# Altium PCB MiniPowerModule.PcbDoc
Units mil, origin at the board's own origin, x right, y up, seen from the top; angles counter-clockwise.
Board outline 2200 x 1500 mil, 4 copper layers (Top Layer, Ground Plane, Power Plane, Bottom Layer), stack 62.449 mil thick; 91 components, 42 nets, 361 pads, 128 vias.
Unrouted connection lines stored in the file: 56.
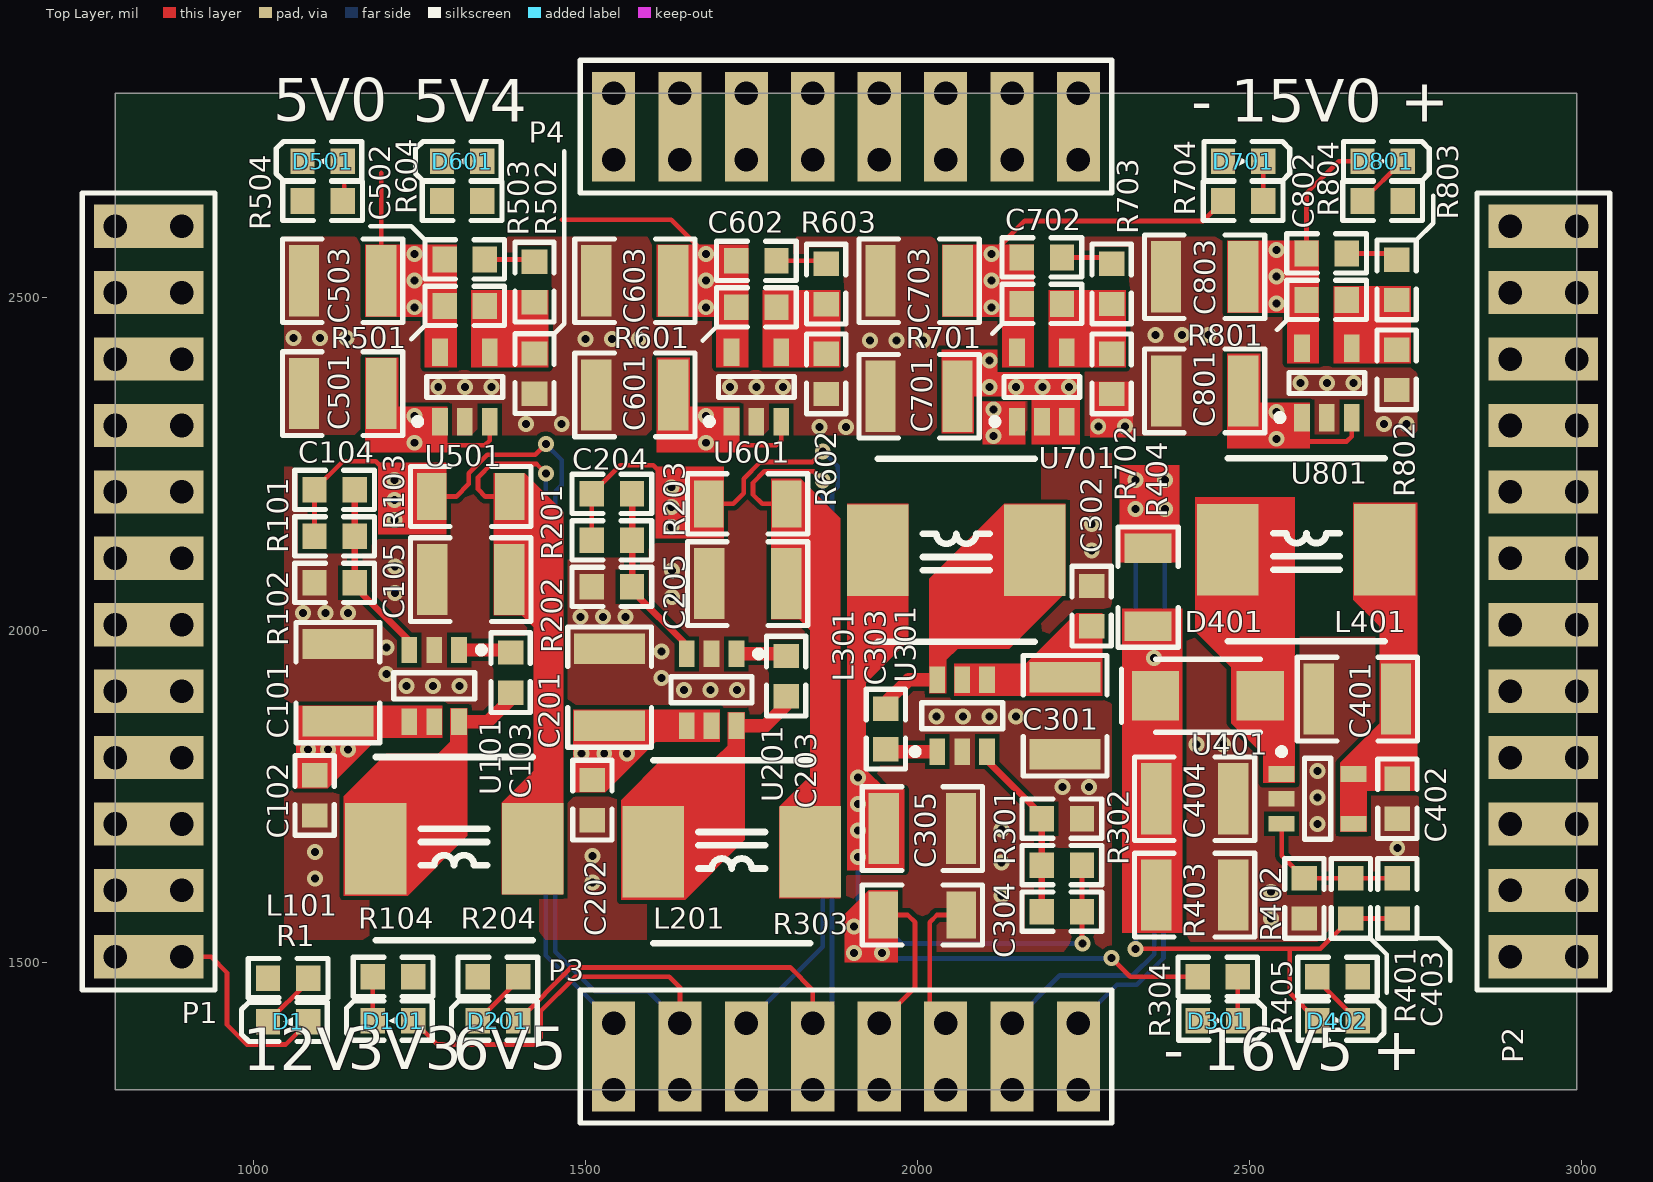
[diagram p0: Top Layer view]
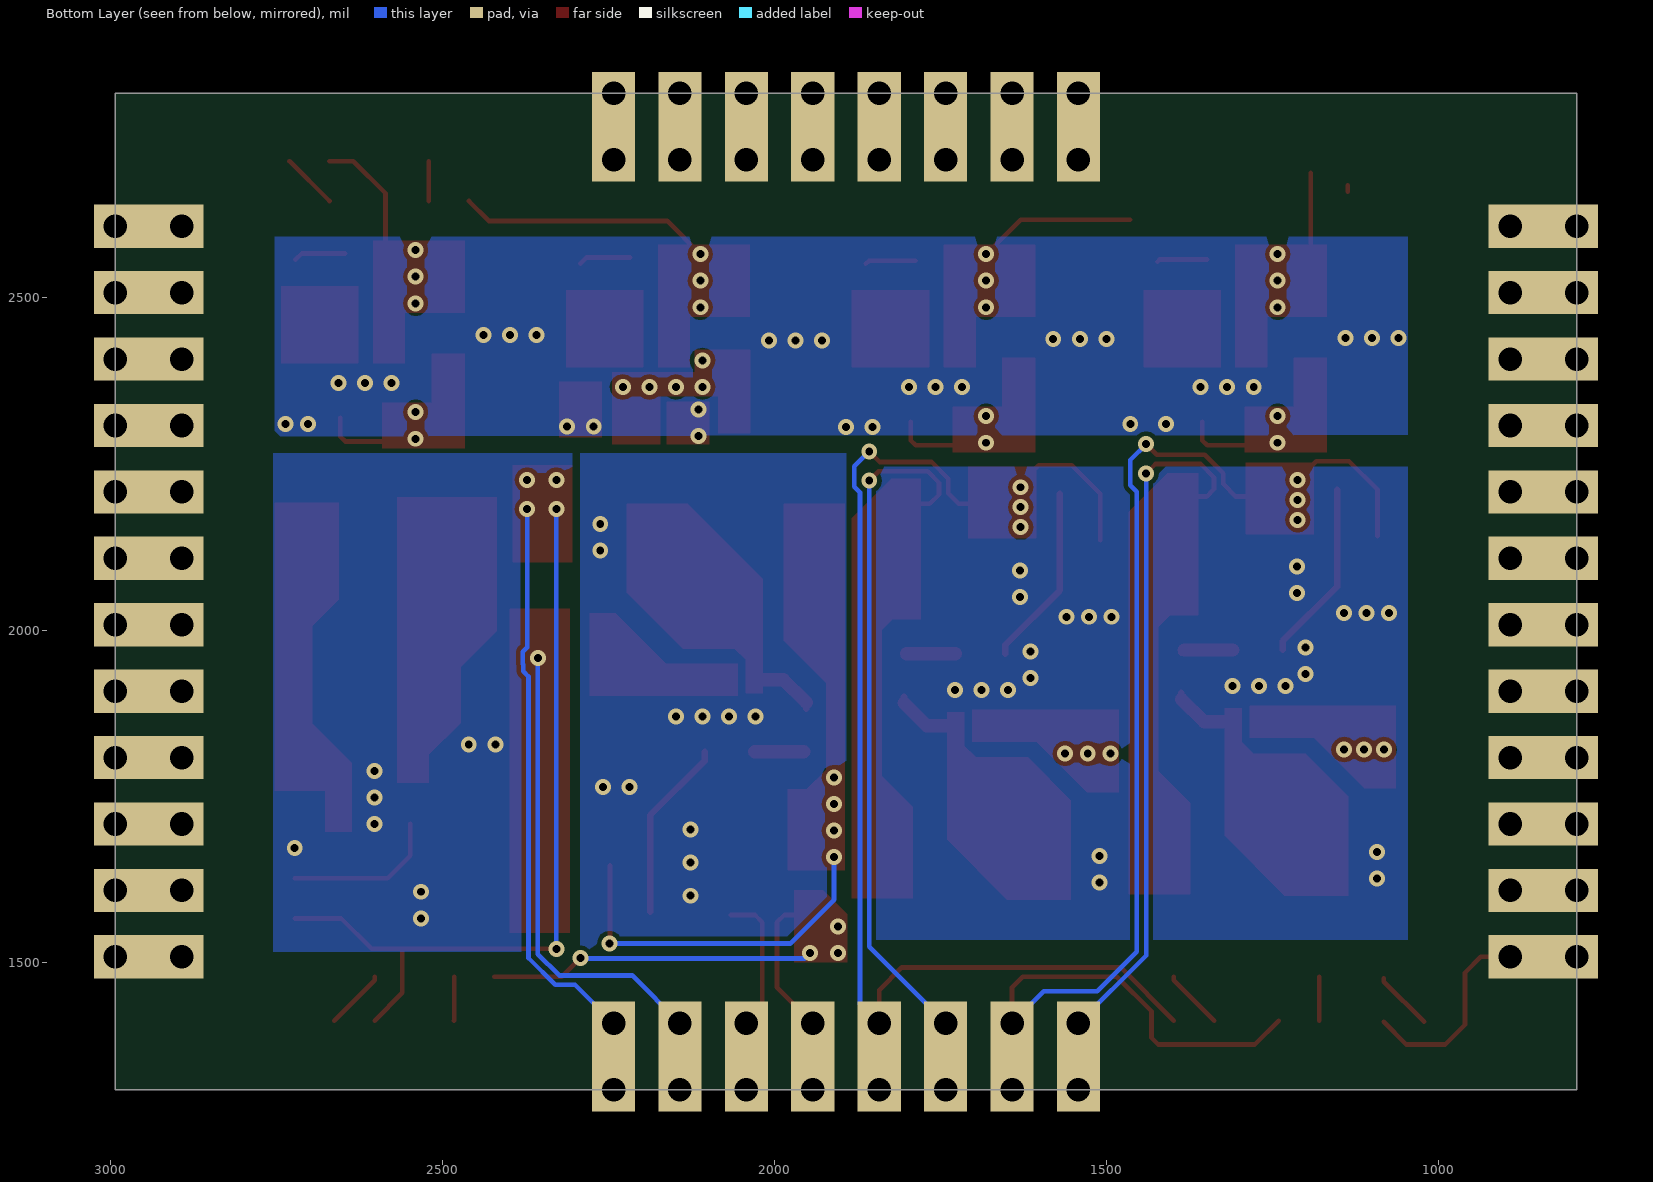
[diagram p1: Bottom Layer view, seen from below]
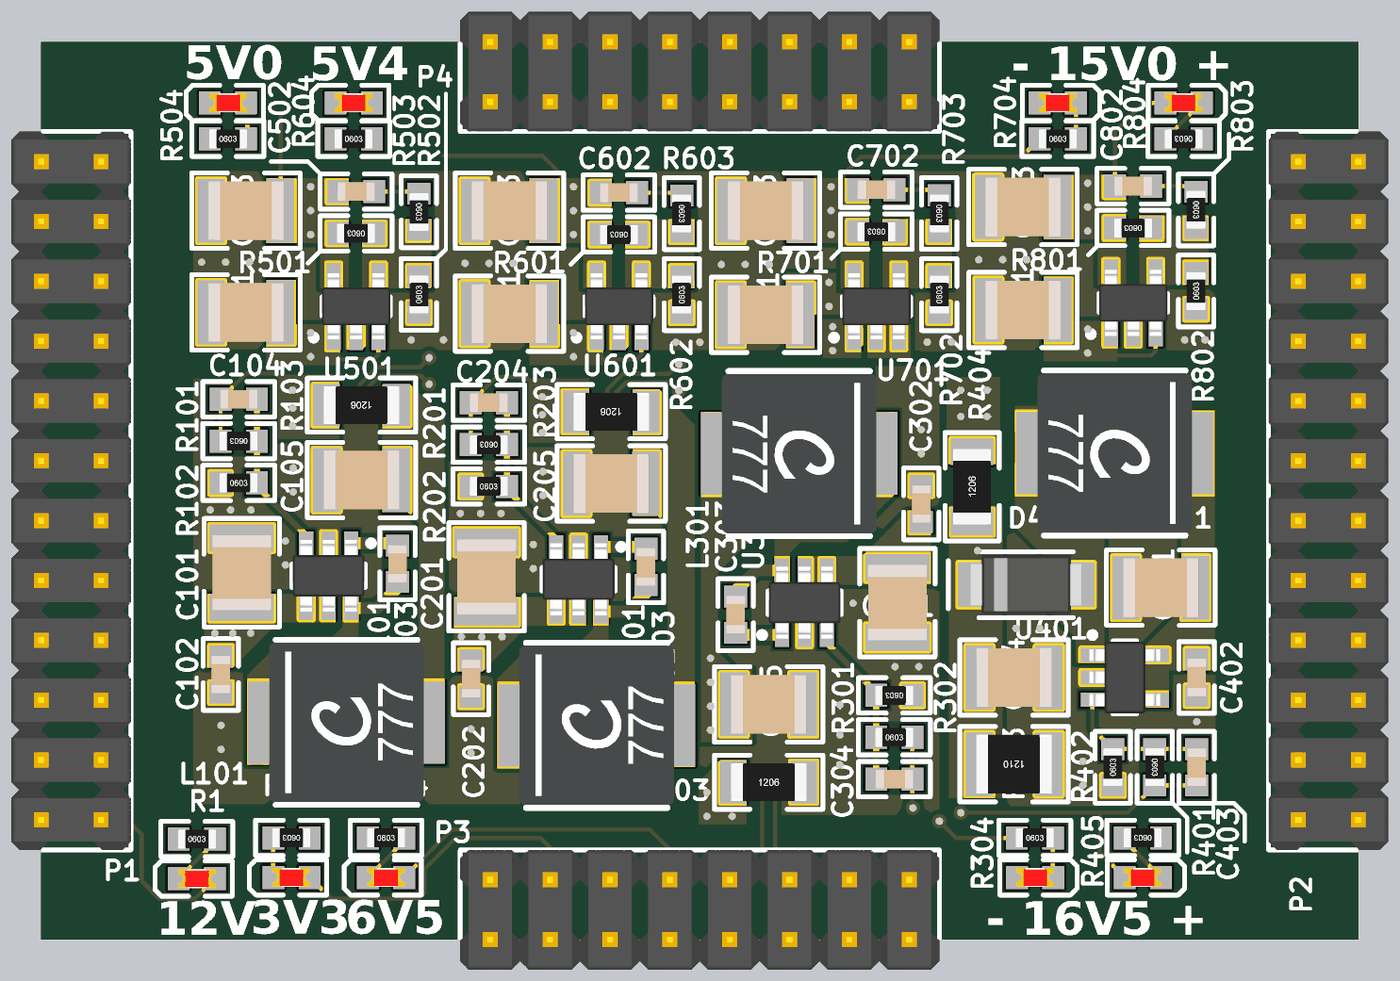
[diagram p2: 3D render of the assembled board from above, using the file's embedded part models]

## Layer stack, top to bottom
Top Solder: solder mask 0.5, Solder Resist, Dk 3.8
Top Layer: signal copper 1.378
Dielectric 1: core 8.284, 7628, Dk 4.5
Ground Plane: signal copper 0.598
Dielectric 3: prepreg 41.929, FR-4, Dk 4.5
Power Plane: signal copper 0.598
Dielectric 4: core 8.284, 7628, Dk 4.5
Bottom Layer: signal copper 1.378
Bottom Solder: solder mask 0.5, Solder Resist, Dk 3.8

## Board outline
2992,1308 792,1308 792,2808 2992,2808

## Design rules (kind name [scope] priority, off if disabled: settings)
Clearance [All] p1: gap=7 ignorepadtopadclearanceinfootprint=FALSE
PlaneConnect [All] p1: pad.planeconnectstyle=Relief pad.reliefexpansion=20 pad.reliefentries=4 pad.reliefconductorwidth=10 pad.reliefairgap=10 via.planeconnectstyle=Direct via.reliefexpansion=20 via.reliefentries=4 via.reliefconductorwidth=10 via.reliefairgap=10
PolygonConnect [All] p1: connectstyle=Direct reliefconductorwidth=10 reliefentries=4 polygonreliefangle="90 Angle" airgapwidth=10
RoutingVias [All] p1: holewidth=12 width=24 viastyle="Through Hole" minholewidth=12 minwidth=24 maxholewidth=28 maxwidth=50
SolderMaskExpansion [All] p1: expansion=4
Width [All] p1: maxlimit=100 minlimit=7 preferedwidth=10
29 further rules are at their usual default settings.

## Classes and differential pairs
component class Ldo.-16V5.-15V0: C701 C702 C703 D701 R701 R702 R703 R704 U701
component class Ldo.+16V5.+15V0: C801 C802 C803 D801 R801 R802 R803 R804 U801
component class Ldo.+6V5.+5V4: C601 C602 C603 D601 R601 R602 R603 R604 U601
component class Ldo.+6V5.+5V0: C501 C502 C503 D501 R501 R502 R503 R504 U501
component class Dcdc.12V0.+16V5: C401 C402 C403 C404 D401 D402 L401 R401 R402 R403 R404 R405 U401
component class Dcdc.12V0.-16V5: C301 C302 C303 C304 C305 D301 L301 R301 R302 R303 R304 U301
component class Dcdc.12V0.+6V5: C201 C202 C203 C204 C205 D201 L201 R201 R202 R203 R204 U201
component class Dcdc.12V0.+3V3: C101 C102 C103 C104 C105 D101 L101 R101 R102 R103 R104 U101
component class Connector: D1 P1 P2 P3 P4 R1

## Components (designator, comment, footprint, x,y, rotation, side; value= is the part's Value field where it differs from the comment)
C101 "Cap" C1210 1127,1921 r270 top value=10uf@50V
C102 "Cap" C0603 1092,1751 r90 top value=0.1uf
C103 "Cap" C0603 1387,1936 r90 top value=0.1uf
C104 "Cap" C0603 1122,2211 r0 top value=NC
C105 "Cap" C1210 1327,2076 r0 top value=10uf@50V
C201 "Cap" C1210 1536,1914 r270 top value=10uf@50V
C202 "Cap" C0603 1510,1744 r90 top value=0.1uf
C203 "Cap" C0603 1802,1930.68 r90 top value=0.1uf
C204 "Cap" C0603 1539.6,2205.13 r0 top value=NC
C205 "Cap" C1210 1744,2070 r0 top value=10uf@50V
C301 "Cap" C1210 2222,1871 r90 top value=10uf@50V
C302 "Cap" C0603 2262,2036 r270 top value=0.1uf
C303 "Cap" C0603 1952,1851 r270 top value=0.1uf
C304 "Cap" C0603 2217,1576 r180 top value=NC
C305 "Cap" C1210 2007,1701 r180 top value=10uf@50V
C401 "Cap" C1210 2662,1896 r0 top value=10uf@50V
C402 "Cap" C0603 2722,1746 r90 top value=0.1uf
C403 "Cap" C0603 2722,1596 r90 top value=180pf
C404 "Cap" C1210 2417,1746 r180 top value=10uf@50V
C501 "Cap" C1210 1134,2356 r0 top value=10uf@50V
C502 "Cap" C0603 1318,2558 r0 top value=0.1uf
C503 "Cap" C1210 1134,2526 r0 top value=10uf@50V
C601 "Cap" C1210 1574,2354 r0 top value=10uf@50V
C602 "Cap" C0603 1757,2556 r0 top value=0.1uf
C603 "Cap" C1210 1574,2526 r0 top value=10uf@50V
C701 "Cap" C1210 2001.93,2352 r0 top value=10uf@50V
C702 "Cap" C0603 2187,2561 r0 top value=0.1uf
C703 "Cap" C1210 2002,2526 r0 top value=10uf@50V
C801 "Cap" C1210 2432,2360 r0 top value=10uf@50V
C802 "Cap" C0603 2615.68,2567 r0 top value=0.1uf
C803 "Cap" C1210 2431.93,2532 r0 top value=10uf@50V
D1 "LED" LED0603 1052,1410 r180 top value=GREEN
D101 "LED" LED0603 1210,1412 r180 top value=GREEN
D201 "LED" LED0603 1368,1412 r180 top value=GREEN
D301 "LED" LED0603 2452,1412 r0 top value=GREEN
D401 "Diode" DIODE-SMAF 2437,1901 r0 top value=SS14
D402 "LED" LED0603 2632,1412 r0 top value=GREEN
D501 "LED" LED0603 1104,2706 r180 top value=GREEN
D601 "LED" LED0603 1314,2706 r180 top value=GREEN
D701 "LED" LED0603 2490,2706 r0 top value=GREEN
D801 "LED" LED0603 2700,2706 r0 top value=GREEN
L101 "Inductor Iron" L06063 1302,1671 r0 top value=10uH@4A
L201 "Inductor Iron" L06063 1720,1666 r0 top value=10uH@4A
L301 "Inductor Iron" L06063 2058,2120 r180 top value=22uH@2.3A
L401 "Inductor Iron" L06063 2585.11,2120.99 r180 top value=10uH@4A
P1 "Header 12X2" HDR2X12 892,1508 r180 top locked
P2 "Header 12X2" HDR2X12 2992,1508 r180 top locked
P3 "Header 8X2" HDR2X8 1542,1308 r90 top locked
P4 "Header 8X2" HDR2X8 1542,2708 r90 top locked
R1 "Res" R0603 1052,1476 r0 top value=22K1
R101 "Res" R0603 1122,2141 r180 top value=51K
R102 "Res" R0603 1122,2071 r0 top value=22K1
R103 "Res" R1206 1327,2201 r180 top value=0R1
R104 "Res" R0603 1210,1478 r180 top value=3K3
R201 "Res" R0603 1539.6,2135.13 r180 top value=121K
R202 "Res" R0603 1539.6,2065.13 r0 top value=22K1
R203 "Res" R1206 1744,2190 r180 top value=0R1
R204 "Res" R0603 1368,1478 r0 top value=22K1
R301 "Res" R0603 2217,1646 r0 top value=340K
R302 "Res" R0603 2217,1716 r180 top value=22K1
R303 "Res" R1206 2007,1571 r0 top value=0R1
R304 "Res" R0603 2451.68,1478 r0 top value=47K
R401 "Res" R0603 2652,1596 r270 top value=169K
R402 "Res" R0603 2582,1596 r90 top value=13K3
R403 "Res" R1210 2417,1601 r180 top value=NC
R404 "Res" R1206 2347,2064.66 r90 top value=0R1
R405 "Res" R0603 2632,1478 r180 top value=47K
R501 "Res" R0603 1318,2488 r180 top value=316K
R502 "Res" R0603 1423,2386 r90 top value=100K
R503 "Res" R0603 1423,2524 r270 top value=10K
R504 "Res" R0603 1104,2646 r0 top value=10K
R601 "Res" R0603 1757,2486 r180 top value=348K
R602 "Res" R0603 1862,2385.68 r90 top value=100K
R603 "Res" R0603 1862,2521 r270 top value=10K
R604 "Res" R0603 1314,2646 r0 top value=10K
R701 "Res" R0603 2187,2491 r180 top value=147K
R702 "Res" R0603 2292,2385.68 r90 top value=13K
R703 "Res" R0603 2292,2521.32 r270 top value=13K
R704 "Res" R0603 2490,2646 r0 top value=47K
R801 "Res" R0603 2615.69,2497 r180 top value=1M15
R802 "Res" R0603 2721,2391.68 r90 top value=100K
R803 "Res" R0603 2721,2527.32 r270 top value=10K
R804 "Res" R0603 2700,2646 r180 top value=47K
U101 "TPS560430" TPS560430-SOT23-6 1272,1916 r270 top
U201 "TPS560430" TPS560430-SOT23-6 1689.6,1910.13 r270 top
U301 "TPS560430" TPS560430-SOT23-6 2067,1871 r90 top
U401 "LMR62014" LMR62014-SOT23-5 2602,1746 r0 top
U501 "ADP7118" ADP7118-TSOT5 1318,2366 r90 top
U601 "ADP7118" ADP7118-TSOT5 1757,2366 r90 top
U701 "ADP7182" ADP7182-TSOT5 2187,2366 r90 top
U801 "ADP7118" ADP7118-TSOT5 2616,2372 r90 top

## Footprints (in the part's own frame and the unit in brackets; to place one, negate y for a bottom-side part, rotate by r counter-clockwise, add the part's x,y. Pads: shape width x height; smd on the part's side, far side on the other; paste and mask are expansions set on the pad)
ADP7118-TSOT5 [mm] "SOT23, 5-Leads, Body 2.90x2.80mm, Pitch 0.95mm, IPC Medium Density"
  rect 1.05x0.6 smd: 1(-1.325,0.95) 2(-1.325,0) 3(-1.325,-0.95) 4(1.325,-0.95) 5(1.325,0.95)
  silkscreen extent -1.45,-1.45 0.4,1.92, body extent -1.4,-1.45 1.4,1.45, height 1
ADP7182-TSOT5 [mm] "SOT23, 5-Leads, Body 2.90x2.80mm, Pitch 0.95mm, IPC Medium Density"
  rect 1.05x0.6 smd: 1(-1.325,0.95) 2(-1.325,0) 3(-1.325,-0.95) 4(1.325,-0.95) 5(1.325,0.95)
  silkscreen extent -1.45,-1.45 0.4,1.92, body extent -1.4,-1.45 1.4,1.45, height 1
C0603 [mm] "Chip Capacitor, 2-Leads, Body 1.60x0.81mm, IPC Medium Density"
  rect 0.93x0.98 smd: 1(-0.77,0) 2(0.77,0)
  silkscreen extent -1.52,-0.75 1.52,0.75, body extent -0.8,-0.4 0.8,0.4, height 0.78
C1210 [mm] "Chip Capacitor, 2-Leads, Body 3.20x2.50mm, IPC Medium Density"
  rect 1.16x2.72 smd: 1(-1.475,0) 2(1.475,0)
  silkscreen extent -2.3,-1.6 2.3,1.6, body extent -1.6,-1.25 1.6,1.25, height 0.77
DIODE-SMAF [mm] "SMAF; 2 C-Bend Leads; Body 5.0 x 2.7 mm, inc. leads (LxW)"
  rect 1.8x1.9 smd: 1(2,0) 2(-2,0)
  silkscreen extent -3.3,-1.4 2,1.4, body extent -2.35,-1.25 2.35,1.25, height 1
HDR2X8 [mm] "Connector; Male Header; 8x2 Position"
  rect 1.5x1.5 hole 0.9: 1(0,0)
  round 1.5 hole 0.9: 2(2.54,0) 3(0,-2.54) 4(2.54,-2.54) 5(0,-5.08) 6(2.54,-5.08) 7(0,-7.62) 8(2.54,-7.62) 9(0,-10.16) 10(2.54,-10.16) 11(0,-12.7) 12(2.54,-12.7) 13(0,-15.24) 14(2.54,-15.24) 15(0,-17.78) 16(2.54,-17.78)
  silkscreen extent -1.27,-19.05 3.81,1.27, body extent -1.27,-19.05 3.81,1.27, height 9.5
HDR2X12 [mm] "Connector; Male Header; 12x2 Position"
  rect 1.5x1.5 hole 0.9: 1(0,0)
  round 1.5 hole 0.9: 2(2.54,0) 3(0,-2.54) 4(2.54,-2.54) 5(0,-5.08) 6(2.54,-5.08) 7(0,-7.62) 8(2.54,-7.62) 9(0,-10.16) 10(2.54,-10.16) 11(0,-12.7) 12(2.54,-12.7) 13(0,-15.24) 14(2.54,-15.24) 15(0,-17.78) 16(2.54,-17.78) 17(0,-20.32) 18(2.54,-20.32) 19(0,-22.86) 20(2.54,-22.86) 21(0,-25.4) 22(2.54,-25.4) 23(0,-27.94) 24(2.54,-27.94)
  silkscreen extent -1.27,-29.21 3.81,1.27, body extent -1.27,-29.21 3.81,1.27, height 9.5
L06063 [mm] "贴片功率电感 MHCI06030"
  rect 2.35x3.5 smd: 1(-3,0) 2(3,0)
  silkscreen extent -3,-3.5 3,3.5, body extent -3.28,-3.38 3.28,3.38, height 3
LED0603 [mm] "Chip LED, 2-Leads, Body 1.60x0.80mm, IPC Medium Density"
  rect 0.93x0.98 smd: 1(-0.77,0) 2(0.77,0)
  silkscreen extent -1.5,-0.75 1.78,0.75, body extent -0.8,-0.4 0.8,0.4, height 0.6
LMR62014-SOT23-5 [mm] "SOT23, 5-Leads, Body 2.90x2.80mm, Pitch 0.95mm, IPC Medium Density"
  rect 1x0.6 smd: 1(-1.375,0.95) 2(-1.375,0) 3(-1.375,-0.95) 4(1.375,-0.95) 5(1.375,0.95)
  silkscreen extent -1.5,-1.55 0.5,1.92, body extent -1.5,-1.53 1.5,1.53, height 1.45
R0603 [mm] "Chip Resistor, 2-Leads, Body 1.60x0.80mm, IPC Medium Density"
  rect 0.93x0.98 smd: 1(-0.77,0) 2(0.77,0)
  silkscreen extent -1.52,-0.75 1.52,0.75, body extent -0.8,-0.4 0.8,0.4, height 0.44
R1206 [mm] "Chip Resistor, 2-Leads, Body 3.20x1.60mm, IPC Medium Density"
  rect 1.13x1.8 smd: 1(-1.49,0) 2(1.49,0)
  silkscreen extent -2.3,-1.15 2.3,1.15, body extent -1.6,-0.8 1.6,0.8, height 0.6
R1210 [mm] "Chip Resistor, 2-Leads, Body 3.20x2.50mm, IPC Medium Density"
  rect 1.16x2.72 smd: 1(-1.475,0) 2(1.475,0)
  silkscreen extent -2.3,-1.6 2.3,1.6, body extent -1.6,-1.25 1.6,1.25, height 0.58
TPS560430-SOT23-6 [mm] "SOT23, 6-Leads, Body 2.90x2.80mm, Pitch 0.95mm, IPC Medium Density"
  rect 1x0.6 smd: 1(-1.375,0.95) 2(-1.375,0) 3(-1.375,-0.95) 4(1.375,-0.95) 5(1.375,0) 6(1.375,0.95)
  silkscreen extent -1.5,-1.55 0.5,1.93, body extent -1.53,-1.53 1.53,1.53, height 1.1

## Part data
D401: "通用二极管"
L101 L201 L301 L401: "Magnetic-Core Inductor"
P1 P2: "Header, 12-Pin, Dual row"
P3 P4: "Header, 8-Pin, Dual row"
R1 R101 R102 R103 R104 R201 R202 R203 R204 R301 R302 R303 R304 R401 R402 R403 R404 R405 R501 R502 R503 R504 R601 R602 R603 R604 R701 R702 R703 R704 R801 R802 R803 R804: "电阻"
U101 U201 U301: "TPS560430 SIMPLE SWITCHER? 4-V to 36-V, 600-mA Synchronous Step-Down Converter"
U401: "LMR62014 SIMPLE SWITCHER? 20Vout, 1.4A Step-Up Voltage Regulator in SOT-23"
U501 U601 U801: library part ADP7118AUJ, "20 V, 200 mA, Low Noise,CMOS LDO Linear Regulator."
U701: library part ADP7182AUJ, "–28 V, ?200 mA, Low Noise, Linear Regulator"

## Free pads (board coordinates)
  rect 165x65 smd: 2(842,1508) 2(842,1608) 2(842,1708) 2(842,1808) 2(842,1908) 2(842,2008) 2(842,2108) 2(842,2208) 2(842,2308) 2(842,2408) 2(842,2508) 2(842,2608) 2(2942,1508) 2(2942,1608) 2(2942,1708) 2(2942,1808) 2(2942,1908) 2(2942,2008) 2(2942,2108) 2(2942,2208) 2(2942,2308) 2(2942,2408) 2(2942,2508) 2(2942,2608)
  rect 165x65 smd far side: 2(842,1508) 2(842,1608) 2(842,1708) 2(842,1808) 2(842,1908) 2(842,2008) 2(842,2108) 2(842,2208) 2(842,2308) 2(842,2408) 2(842,2508) 2(842,2608) 2(2942,1508) 2(2942,1608) 2(2942,1708) 2(2942,1808) 2(2942,1908) 2(2942,2008) 2(2942,2108) 2(2942,2208) 2(2942,2308) 2(2942,2408) 2(2942,2508) 2(2942,2608)
  rect 65x165 smd: 2(1542,1358) 2(1542,2758) 2(1642,1358) 2(1642,2758) 2(1742,1358) 2(1742,2758) 2(1842,1358) 2(1842,2758) 2(1942,1358) 2(1942,2758) 2(2042,1358) 2(2042,2758) 2(2142,1358) 2(2142,2758) 2(2242,1358) 2(2242,2758)
  rect 65x165 smd far side: 2(1542,1358) 2(1542,2758) 2(1642,1358) 2(1642,2758) 2(1742,1358) 2(1742,2758) 2(1842,1358) 2(1842,2758) 2(1942,1358) 2(1942,2758) 2(2042,1358) 2(2042,2758) 2(2142,1358) 2(2142,2758) 2(2242,1358) 2(2242,2758)

## Via types
v1: diameter 24, hole 12, Top Layer to Bottom Layer, tented both sides, 128 vias

## Nets (pads, with @x,y where several pads share a name; then routed paths per layer and width w, separated by ;. In a path a pad name is that pad's centre, name@x,y a point inside that pad or via, vN(x,y) a via of type N, cw(c..) or ccw(c..) an arc to the next point about the centre after c; other vN are vias at no path point)
3V3_OUT: C104.1 D101.1 P2.1 P2.2 P2.3 P2.4 P3.3 P3.4 pad.2@1642,1358 pad.2@2942,1508 pad.2@2942,1608 R101.2 R103.2 | length 2037.3
  Top Layer w7: R101.2 C104.1 1134.69,2254 1184,2254 v1(1212,2226) ; D101.1 1276.31,1376 1422,1376 1432,1386 1432,1425.89 1484.11,1478 1626,1478 1642,1462 P3.4 pad.2@1642,1358 ; R103.2 1305,2201 1324,2220 1324,2236 1352,2264 1424,2264 v1(1440,2280)
  Bottom Layer w7: v1(1440,2280) 1464,2256 1464,2218 1454,2208 1454,1515.8 1513.8,1456 1594,1456 P3.4
  other v1: 1212,2166 1212,2196
5V0_OUT: C502.1 C503.2 D501.1 P2.5 P2.6 P2.7 P2.8 pad.2@2942,1708 pad.2@2942,1808 R501.2 U501.5 | length 162.2
  Top Layer w7: C503.2 1192.07,2688.24
  other v1: 1242,2486 1242,2526 1242,2566
5V4_OUT: C602.1 C603.2 D601.1 P2.9 P2.10 P2.11 P2.12 pad.2@2942,1908 pad.2@2942,2008 R601.2 U601.5 | length 238.2
  Top Layer w7: 1464.31,2618 1629,2618 v1(1681,2566)
  other v1: 1681,2486 1681,2526
6V5_OUT: C204.1 C501.2 C601.2 D201.1 P1.9 P1.10 P1.11 P1.12 P3.7 P3.8 pad.2@842,1908 pad.2@842,2008 pad.2@1842,1358 R201.2 R203.2 U501.1 U501.3 U601.1 U601.3 | length 2191.6
  Top Layer w7: U501.1 1280.6,2283.4 1286,2278 1348,2278 1355.4,2285.4 U501.3 ; D201.1 1478.31,1492 1808,1492 1842,1458 P3.8 pad.2@1842,1358 ; R201.2 C204.1 1552.28,2248.13 1601.6,2248.13 v1@1629.6,2220.13 ; R203.2 1722,2190 1738,2206 1738,2227.8 1763.2,2253 1841,2253 v1(1857,2269) ; U601.1 1719.6,2283.4 1725,2278 1787,2278 1794.4,2285.4 U601.3
  Bottom Layer w7: P3.8 1871,1437 1871,2207.18 1879.5,2215.68 1879.5,2246.5 v1(1857,2269)
  other v1: 1629,2155 1629,2185 1629,2215 1242,2282 1681,2282 1242,2322 1681,2322
12V0_IN: C101.2 C102.2 C201.2 C202.2 C301.2 C302.2 C401.2 C402.2 D1.1 L401.1 P1.1 P1.2 P1.3 P1.4 pad.2@842,1508 pad.2@842,1608 U101.4 U101.5 U201.4 U201.5 U301.4 U301.5 U401.4 U401.5 | length 354.8
  Top Layer w7: pad.2@842,1508 P1.1 936,1508 960,1484 960,1406 990,1376 1048.31,1376 D1.1
  other v1: 1494,1814 1528,1814 1562,1814 1082,1820 1112,1820 1142,1820
15V0_OUT: C802.1 C803.2 D801.1 P2.13 P2.14 P2.15 P2.16 pad.2@2942,2108 pad.2@2942,2208 R801.2 U801.5 | length 195
  Top Layer w7: C802.1 2585.37,2657.68 2633.69,2706 D801.1
  other v1: 2540,2492 2540,2532 2540,2572
16V5_OUT: C403.1 C801.2 D402.1 P1.13 P1.14 P1.15 P1.16 P3.15 P3.16 pad.2@842,2108 pad.2@842,2208 pad.2@2242,1358 R401.2 R404.2 U801.1 U801.3 | length 2189.9
  Top Layer w7: v1(2328,1520) 2560,1520 ; U801.1 2578.6,2289.4 2584,2284 2646,2284 2653.4,2291.4 U801.3 ; D402.1 2560,1453.69 2560,1520 ; C403.1 R401.2 2606.32,1520 2560,1520
  Bottom Layer w7: P3.16 2300,1466 2329.8,1466 2370,1506.2 2370,1930 2378,1938 2378,1948.18 2378.5,1948.68 2378.5,1967.32 2372,1973.82 v1(2372,2182) ; v1(2328,1520) v1(2328,2182)
  other v1: 2328,2226 2372,2226 2540,2288 2540,2328
-15V0_OUT: C702.1 C703.2 P2.21 P2.22 P2.23 P2.24 pad.2@2942,2508 pad.2@2942,2608 R701.2 R704.1 U701.5 | length 381.5
  Top Layer w7: v1(2111.31,2566) 2161.31,2616 2429.69,2616 R704.1
  other v1: 2111.31,2486 2111.31,2526
-16V5_OUT: C701.2 P1.21 P1.22 P1.23 P1.24 P3.9 P3.10 pad.2@842,2508 pad.2@842,2608 pad.2@1942,1358 R303.1 R304.1 U701.2 U701.3 | length 817.3
  Top Layer w7: P3.9 1942,1358 P3.10 1996,1462 1996,1560 1985,1571 R303.1 ; v1(2292,1506) 2320,1478 R304.1
  Bottom Layer w7: v1(1946,1514) 1954.5,1505.5 2291.5,1505.5 v1(2292,1506)
  other v1: 1904,1514 1904,1554 2108,2366 2148,2366 2188,2366 2228,2366 2108,2406
GND: C101.1 C102.1 C105.1 C201.1 C202.1 C205.1 C304.1 C305.2 C401.1 C402.1 C404.1 C501.1 C503.1 C601.1 C603.1 C701.1 C703.1 C801.1 C803.1 D301.1 D701.1 L301.2 P1.5 P1.6 P1.7 P1.8 P1.17 P1.18 P1.19 P1.20 P2.17 P2.18 P2.19 P2.20 P4.1 P4.2 P4.3 P4.4 P4.5 P4.6 P4.7 P4.8 P4.9 P4.10 P4.11 P4.12 P4.13 P4.14 P4.15 P4.16 pad.2@842,1708 pad.2@842,1808 pad.2@842,2308 pad.2@842,2408 pad.2@1542,2758 pad.2@1642,2758 pad.2@1742,2758 pad.2@1842,2758 pad.2@1942,2758 pad.2@2042,2758 pad.2@2142,2758 pad.2@2242,2758 pad.2@2942,2308 pad.2@2942,2408 R1.1 R102.1 R104.1 R202.1 R204.1 R301.2 R402.1 R403.1 R405.1 R502.1 R504.1 R602.1 R604.1 R702.1 R802.1 R804.1 U101.2 U201.2 U401.2 U501.2 U601.2 U701.1 U801.2 | length 547.6
  Top Layer w7: R301.2 C304.1 2247.31,1528.69 v1(2248,1528)
  Bottom Layer w7: v1(1910,1658) 1910,1594 1976,1528 v1(2248,1528)
  other v1: 2532,1566 2532,1606 1510,1620 1092.4,1625.87 1510,1660 1092.4,1665.87 2722,1672 1910,1698 2602,1708 1910,1738 2602,1748 1910,1778 2602,1788 2420,1828 2460,1828 1648,1910 1688,1910 1728,1910 1230.4,1915.87 1270.4,1915.87 1310.4,1915.87 1614,1928 1200,1934 1614,1968 1200,1974 1492,2020 1526,2020 1560,2020 1074.4,2025.87 1108.4,2025.87 1142.4,2025.87 1630,2050 1213,2056 1630,2090 1213,2096 2114,2292 1852,2306 1892,2306 2271.83,2306.4 2311.83,2306.4 1410,2310 1464,2310 2702,2310 2736,2310 2114,2332 1278.07,2366 1318.07,2366 1358.07,2366 1717.07,2366 1757.07,2366 1797.07,2366 2576.07,2372 2616.07,2372 2656.07,2372 1927.93,2436 1967.93,2436 2007.93,2436 1500,2438 1540,2438 1580,2438 1060,2440 1100,2440 1140,2440 2358,2444 2398,2444 2438,2444
I_3V3+: C105.2 L101.2 P3.1 P3.2 pad.2@1542,1358 R103.1 | length 1068
  Top Layer w7: R103.1@1385.66,2212.34 R103.1 1349,2201 1338,2212 1338,2230.2 1357.8,2250 1426,2250 v1(1440,2236)
  Bottom Layer w7: v1(1440,2236) 1440,1510 P3.2
I_6V5+: C205.2 L201.2 P3.5 P3.6 pad.2@1742,1358 R203.1 | length 1068.3
  Top Layer w7: R203.1 1766,2190 1752,2204 1752,2222 1769,2239 1843,2239 v1(1857,2225) ; R203.1@1803.26,2195.13 R203.1@1803.26,2206.47
  Bottom Layer w7: P3.6 1857,1523 v1(1857,2225)
I_16V5+: C404.2 D401.2 P3.13 P3.14 pad.2@2142,1358 R403.2 R404.1 | length 703.1
  Bottom Layer w7: P3.14 2214,1480 2324,1480 2356,1512 v1(2356,1958)
I_-16V5-: C301.1 C302.1 C305.1 P3.11 P3.12 pad.2@2042,1358 R302.1 R303.2 U301.2 | length 314.2
  Top Layer w7: P3.11 2042,1358 P3.12 2018,1432 2018,1560 2029,1571 R303.2
  other v1: 2126,1600 2126,1650 2126,1700 2218,1764 2258,1764 2028,1870 2068,1870 2108,1870 2148,1870 2262,2120 2262,2160
NetC103_1: C103.1 L101.1 U101.6 | length 101.4
  Top Layer w10: C103.1@1387,1896 C103.1
  Top Layer w20: U101.6 1352.87,1861.87 C103.1@1387,1896
NetC103_2: C103.2 U101.1 | length 79.2
  Top Layer w10: C103.2@1383.18,1970.13 C103.2
  Top Layer w20: U101.1 C103.2@1383.18,1970.13
NetC104_2: C104.2 R101.1 R102.2 U101.3 | length 274.9
  Top Layer w10: C104.2 R102.2 1152.32,2065.68 1234.6,1983.4 U101.3
NetC203_1: C203.1 L201.1 U201.6 | length 101.4
  Top Layer w10: C203.1@1804.6,1890.13 C203.1@1804.6,1899.82
  Top Layer w20: U201.6 1770.46,1856 C203.1@1804.6,1890.13
NetC203_2: C203.2 U201.1 | length 79.2
  Top Layer w10: C203.2@1800.78,1964.27 C203.2@1804.6,1960.45
  Top Layer w20: U201.1 C203.2@1800.78,1964.27
NetC204_2: C204.2 R201.1 R202.2 U201.3 | length 274.9
  Top Layer w10: C204.2 1569.91,2059.82 1652.2,1977.54 U201.3
NetC303_1: C303.1 L301.1 U301.6 | length 101.4
  Top Layer w10: C303.1 C303.1@1952,1891
  Top Layer w20: C303.1@1952,1891 1986.13,1925.13 U301.6
NetC303_2: C303.2 U301.1 | length 79.2
  Top Layer w10: C303.2 C303.2@1955.82,1816.87
  Top Layer w20: C303.2@1955.82,1816.87 U301.1
NetC304_2: C304.2 R301.1 R302.2 U301.3 | length 274.9
  Top Layer w10: U301.3 2104.4,1803.6 2186.68,1721.32 R302.2 R301.1 C304.2
NetC403_2: C403.2 R401.1 R402.2 U401.3 | length 236.4
  Top Layer w7: U401.3 2547.87,1660.45 R402.2 C403.2
NetC502_2: C502.2 R503.1 | length 76.2
  Top Layer w7: C502.2 1419.31,2558 R503.1
NetC602_2: C602.2 R603.1 | length 76.6
  Top Layer w7: C602.2 1857.31,2556 R603.1
NetC702_2: C702.2 R703.1 | length 78.6
  Top Layer w7: C702.2 2282.63,2561 R703.1
NetC802_2: C802.2 R803.1 | length 78.9
  Top Layer w7: C802.2 2711.63,2567 R803.1
NetD1_2: D1.2 R1.2 | length 91.1
  Top Layer w7: D1.2 1082.32,1470.63 R1.2
NetD101_2: D101.2 R104.2 | length 66
  Top Layer w7: D101.2 R104.2
NetD201_2: D201.2 R204.2 | length 91.1
  Top Layer w7: D201.2 1398.32,1472.63 R204.2
NetD301_2: D301.2 R304.2 | length 66.1
  Top Layer w7: R304.2 2482,1412.32 D301.2
NetD401_1: D401.1 L401.2 U401.1
NetD402_2: D402.2 R405.2 | length 91.1
  Top Layer w7: R405.2 2601.68,1472.63 D402.2
NetD501_2: D501.2 R504.2 | length 9.7
  Top Layer w7: R504.2@1136.32,2660 1136.32,2669.68
NetD601_2: D601.2 R604.2
NetD701_2: D701.2 R704.2 | length 60
  Top Layer w7: R704.2 D701.2
NetD801_2: D801.2 R804.2 | length 85.5
  Top Layer w7: R804.2 2729.68,2706 D801.2
NetR501_1: R501.1 R502.2 R503.2 U501.4
NetR601_1: R601.1 R602.2 R603.2 U601.4
NetR701_1: R701.1 R702.2 R703.2 U701.4
NetR801_1: R801.1 R802.2 R803.2 U801.4

## Polygon pours and split planes (outlines as drawn)
GND on Top Layer "GND_L01_P010" (solid, remove dead copper, pour order 10): 2304,1516 2304,2266 2754,2266 2754,1516
I_-16V5- on Top Layer "I_-16V5-_L01_P004" (solid, remove dead copper, pour order 4): 1892,1516 1892,2266 2292,2266 2292,1516
GND on Top Layer "GND_L01_P020" (solid, remove dead copper, pour order 20): 1046,2293.85 1046,2592 2752,2592 2752,2291.85
GND on Top Layer "GND_L01_P014" (solid, remove dead copper, pour order 14): 1046,1534 1046,2246 1884,2246 1884,1534
I_-16V5- on Bottom Layer "I_-16V5-_L04_P006" (solid, remove dead copper, pour order 6): 1892,1516 1892,2266 2292,2266 2292,1516
GND on Bottom Layer "GND_L04_P012" (solid, remove dead copper, pour order 12): 2304,1516 2304,2266 2754,2266 2754,1516
GND on Bottom Layer "GND_L04_P018" (solid, remove dead copper, pour order 18): 1046,1534 1046,2246 1884,2246 1884,1534
GND on Bottom Layer "GND_L04_P016" (solid, remove dead copper, pour order 16): 1046,1534 1046,2246 1884,2246 1884,1534
GND on Bottom Layer "GND_L04_P022" (solid, remove dead copper, pour order 22): 1046,2293.85 1046,2592 2752,2592 2752,2291.85

## Other copper
Top Layer:
  region net GND: 2323.83,2290.4 2259.83,2290.4 2259.83,2330.4 2259.83,2374 2323.83,2374
  region net -16V5_OUT: 2036,2296 2084,2296 2084,2352 2172,2352 2172,2280 2244,2280 2244,2388 2120,2388 2120,2422 2036,2422
  region net -15V0_OUT: 2175,2396 2175,2580 2037,2580 2037,2472 2127,2472 2127,2396
  region net NetR701_1: 2197.31,2396 2197.31,2512 2313.31,2512 2313.31,2396
  region net GND: 2098,2280 2098,2344 2138,2344 2162,2344 2162,2280
  region net 15V0_OUT: 2604,2402 2604,2586 2466,2586 2466,2478 2556,2478 2556,2402
  region net 16V5_OUT: 2466,2274 2466,2416 2516,2416 2516,2342 2590,2342 2590,2274
  region net 6V5_OUT: 1607,2268 1607,2410 1657,2410 1657,2336 1731,2336 1731,2268
  region net 5V4_OUT: 1745,2396 1745,2580 1607,2580 1607,2472 1697,2472 1697,2396
  region net NetR801_1: 2626,2402 2626,2518 2742,2518 2742,2402
  region net NetR601_1: 1767,2396 1767,2512 1883,2512 1883,2396
  region net NetR501_1: 1328,2396 1328,2512 1444,2512 1444,2396
  region net 5V0_OUT: 1306,2396 1306,2580 1168,2580 1168,2472 1258,2472 1258,2396
  region net 6V5_OUT: 1168,2268 1168,2410 1218,2410 1218,2336 1292,2336 1292,2268
  region net 16V5_OUT: 2394,2102.34 2394,2248 2304,2248 2304,2102.34
  region net I_16V5+: 2308,1544 2308,2032 2398,2032 2398,1544
  region net NetD401_1: 2568,1770 2568,2200 2418,2200 2418,1998 2472,1944 2472,1860 2520,1812 2520,1770
  region net 12V0_IN: 2636,1696 2636,1800 2696,1860 2696,2006 2656,2046 2656,2192 2752,2192 2752,1758 2676,1758 2676,1696
  region net -16V5_OUT: 1890,1500 1890,1572 1926,1608 1970,1608 1970,1500
  region net GND: 1894,2190 1894,1638 1980,1638 1980,1760 1952,1760 1922,1790 1922,1920 1986,1984 1986,2190
  region net NetC303_1: 2222,2190 2222,2056 2138,1972 2060,1972 2043,1955 2043,1905 2017,1905 2017,2077 2130,2190
  region net 12V0_IN: 2278,2025 2278,1901 2055,1901 2055,1949 2163,1949 2239,2025
  region net 12V0_IN: 1481.6,1756.13 1481.6,1880.13 1701.6,1880.13 1701.6,1832.13 1605.6,1832.13 1529.6,1756.13
  region net NetC203_1: 1553.6,1594.13 1553.6,1744.13 1617.6,1808.13 1695.6,1808.13 1713.6,1826.13 1713.6,1876.13 1739.6,1876.13 1739.6,1684.13 1649.6,1594.13
  region net I_6V5+: 1779.6,2228 1779.6,2016.13 1821.6,2016.13 1838,1999.73 1838,1780.54 1791.6,1734.13 1791.6,1596.13 1883.6,1596.13 1883.6,2168.4 1824,2228
  region net 6V5_OUT: 1707.6,2246.13 1605.6,2246.13 1605.6,2138.13 1707.6,2138.13
  pour cut-out: 2713.11,2251.99 2457.11,2251.99 2457.11,1989.99 2713.11,1989.99
  pour cut-out: 2186,2266 1892,2266 1892,1988 2186,1988
  pour cut-out: 1592,1534 1848,1534 1848,1796 1592,1796
  pour cut-out: 1174,1540 1430,1540 1430,1802 1174,1802
  region net 3V3_OUT: 1290,2252 1188,2252 1188,2144 1290,2144
  region net I_3V3+: 1362,2236 1362,2022 1404,2022 1422,2004 1422,1788 1374,1740 1374,1602 1466,1602 1466,2178 1408,2236
  region net NetC103_1: 1136,1600 1136,1750 1200,1814 1278,1814 1296,1832 1296,1882 1322,1882 1322,1690 1232,1600
  region net 12V0_IN: 1064,1762 1064,1886 1284,1886 1284,1838 1188,1838 1112,1762

## Silkscreen, mask and mechanical layers (free items; w line width, h text height)
Top Overlay:
  lines w7: 1176,2608 1237.53,2608 1258,2587.53 ; 1237.53,2438 1258,2458.47 ; 1452.53,2446 1468,2461.47 1468,2721 ; 1676.53,2436 1697,2456.47 ; 2112,2446 2127,2461 2127,2461.47 ; 2541,2452 2555.69,2466.69 2555.69,2467.47 ; 2681.53,1536 2706,1511.53 2706,1454 ; 2750.53,2587.32 2776,2612.79 2776,2654 ; 2751.53,1536 2784,1536 2802,1518 2802,1472
  text "5V0" at 1030,2746 h110
  text "5V4" at 1240,2744 h110
  text "- 15V0 +" at 2412,2744 h110
  text "3V3" at 1142,1318 h110
  text "6V5" at 1300,1318 h110
  text "12V" at 984,1316 h110
  text "- 16V5 +" at 2370,1316 h110
Mechanical 1:
  the board outline again, w10